# Altium PCB ESP32_Dongle.PcbDoc
Units mil, origin at the board's own origin, x right, y up, seen from the top; angles counter-clockwise.
Board outline 825 x 1415 mil, 2 copper layers (Top Layer, Bottom Layer); 56 components, 30 nets, 182 pads, 76 vias.
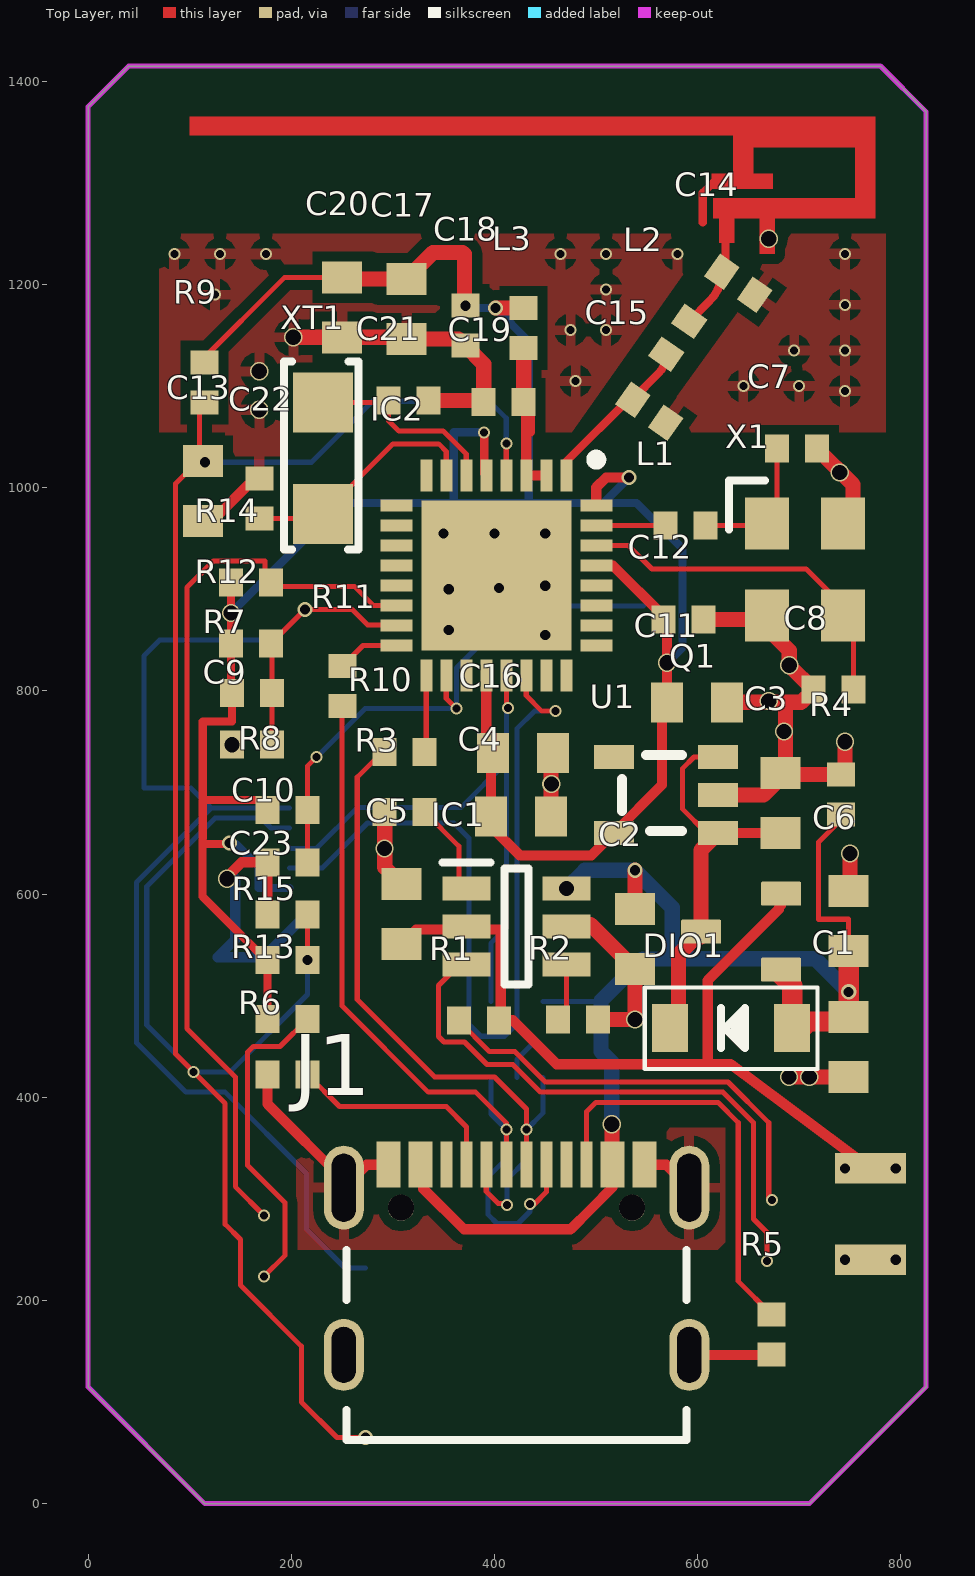
[diagram p0: Top Layer view]
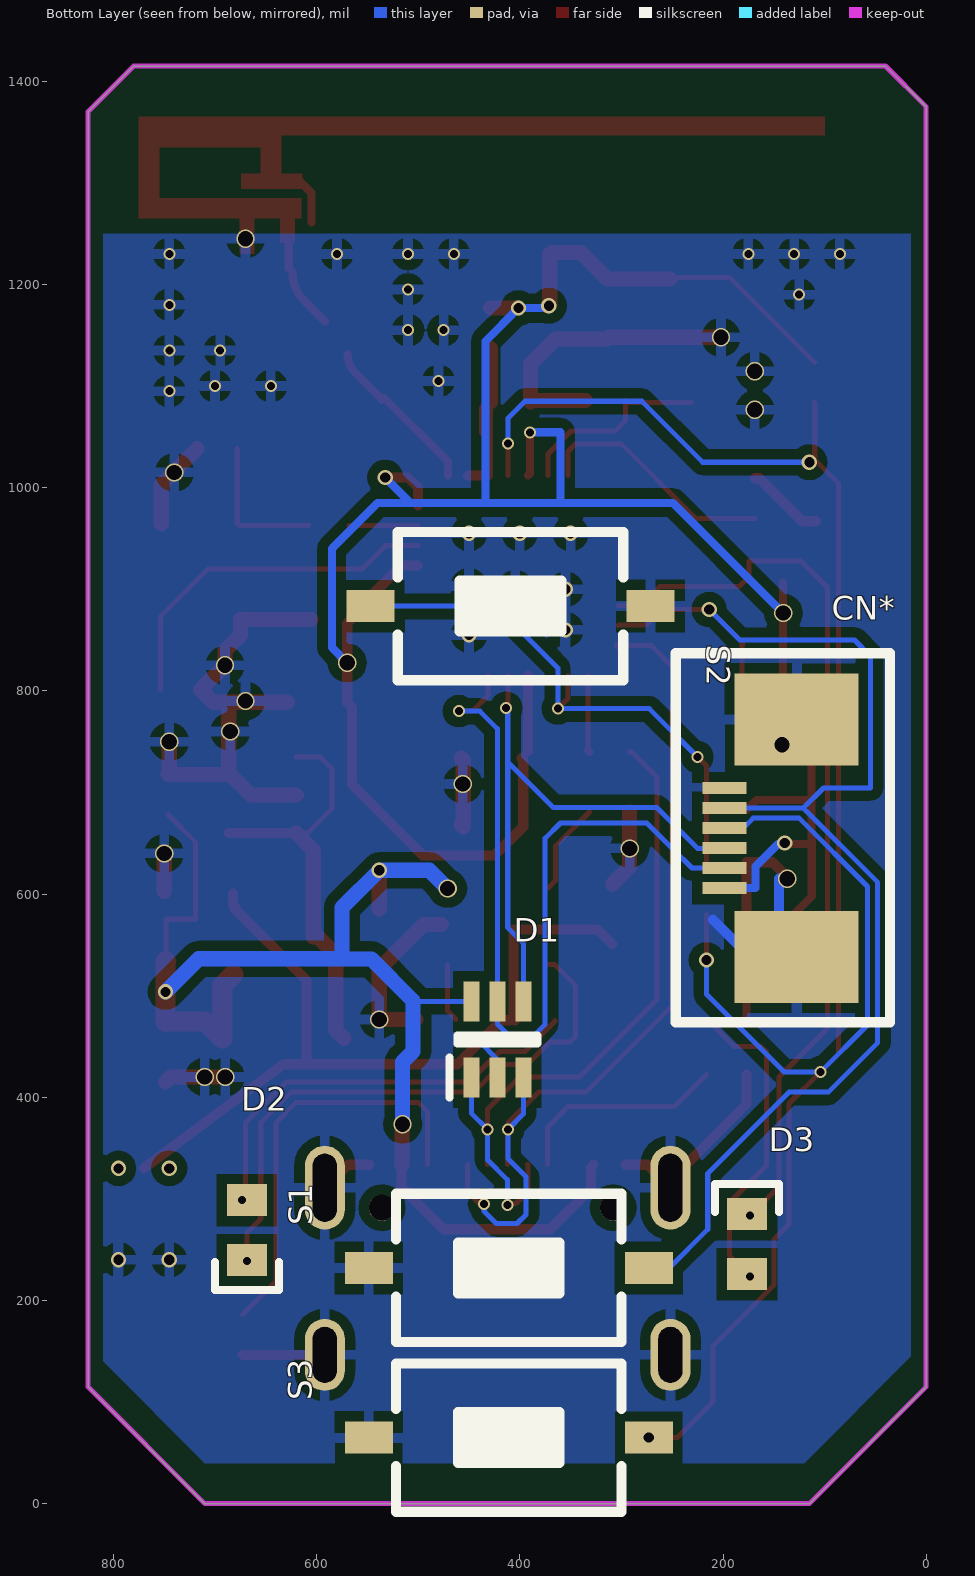
[diagram p1: Bottom Layer view, seen from below]
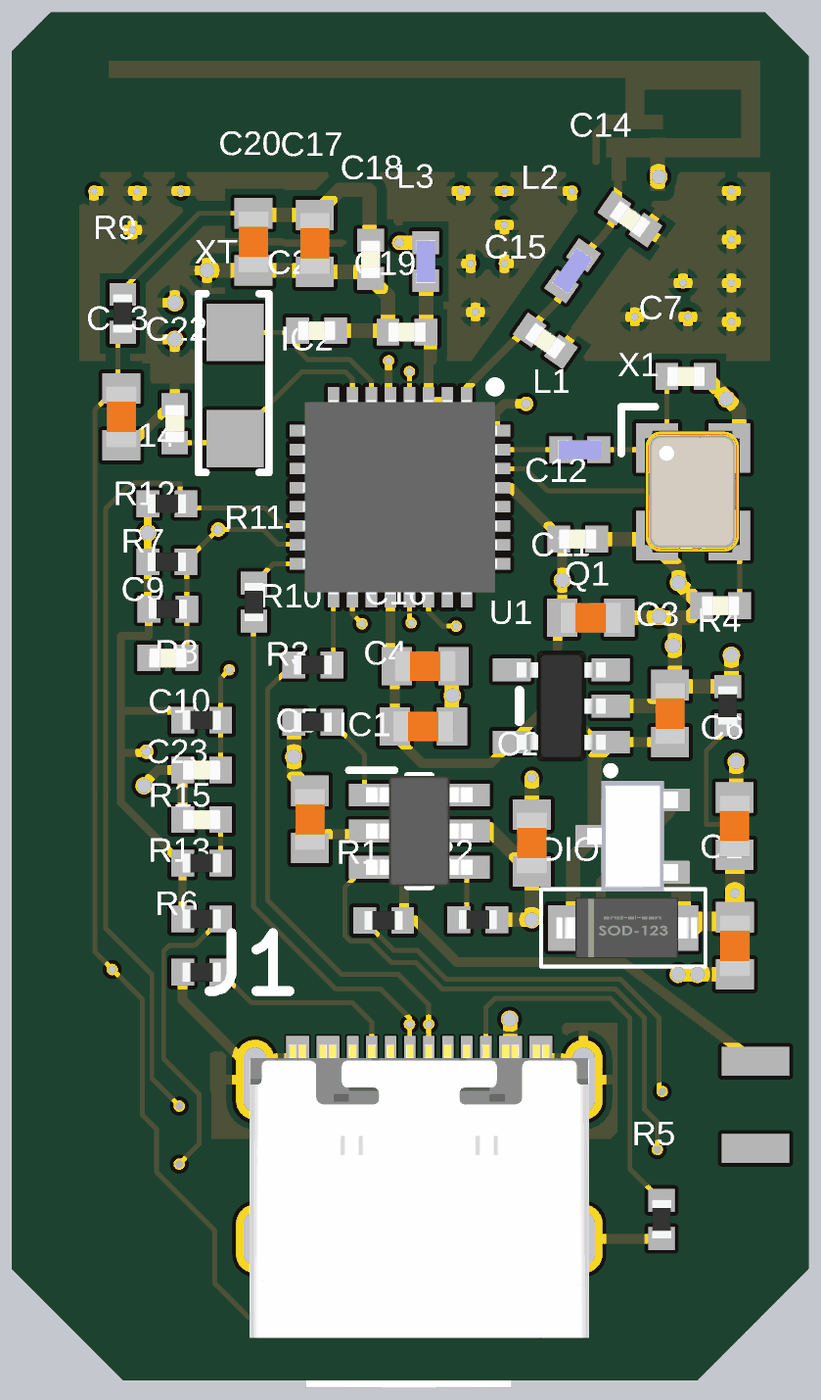
[diagram p2: 3D render of the assembled board from above, using the file's embedded part models]
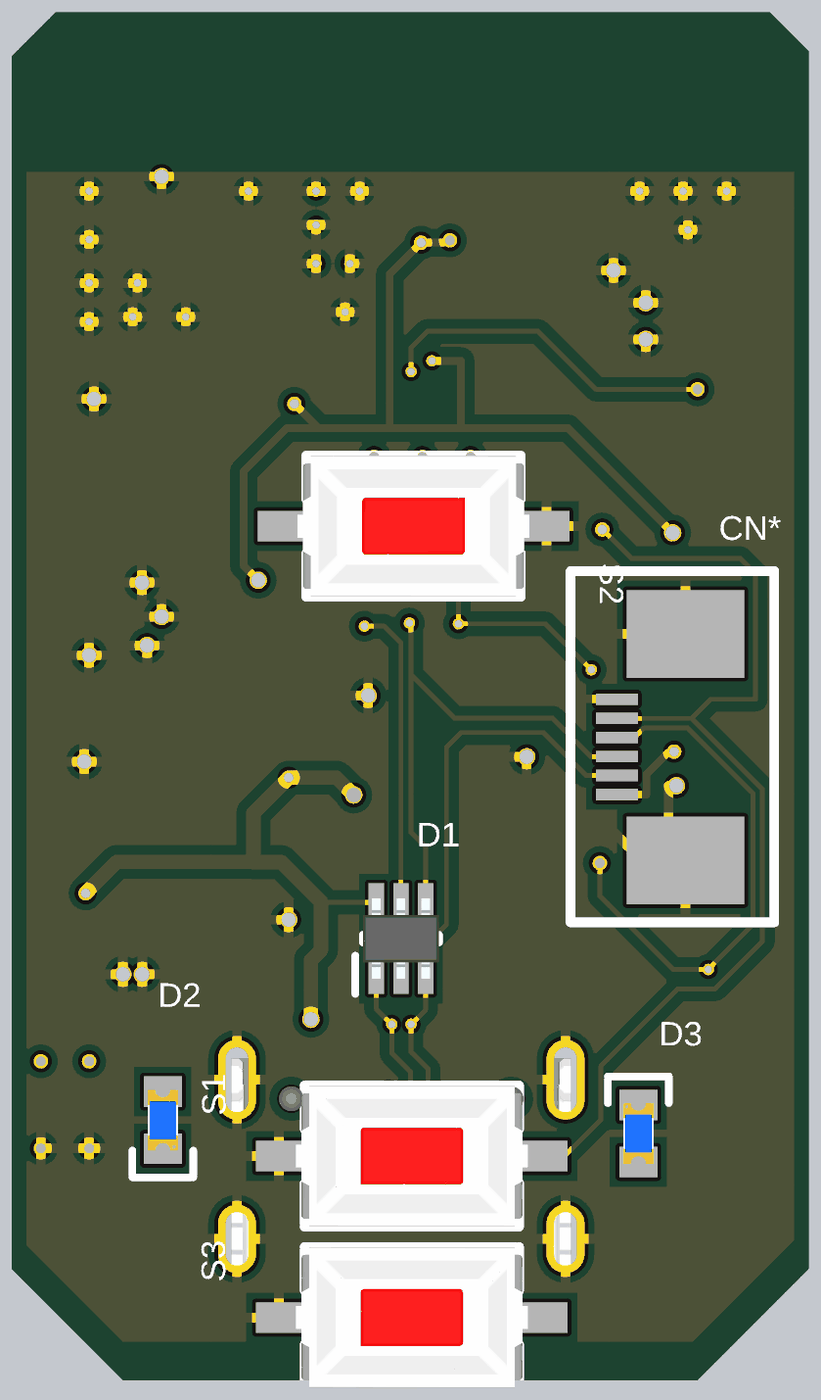
[diagram p3: 3D render of the assembled board from below, using the file's embedded part models]

## Layer stack, top to bottom
Top Solder: solder mask 0.4, Solder Resist, Dk 3.5
Top Layer: signal copper 1.4
Dielectric 1: dielectric 12.6, FR-4, Dk 4.8
Bottom Layer: signal copper 1.4
Bottom Solder: solder mask 0.4, Solder Resist, Dk 3.5

## Board outline
0,115 0,1375 40,1415 780,1415 825,1370 825,115 710,0 115,0

## Design rules (kind name [scope] priority, off if disabled: settings)
Clearance [All] p1: gap=10 ignorepadtopadclearanceinfootprint=FALSE except(0: Arc-Hole Track-Hole SMDPad-Hole THPad-Hole Via-Hole Fill-Hole Poly-Hole Region-Hole Text-Hole; 5: Arc-Arc Arc-Track Arc-SMDPad Track-Track Track-SMDPad SMDPad-SMDPad)
DiffPairsRouting [All] p1: maxlimit=10 minlimit=10 mostfreqgap=10 toplayer_minwidth=5 toplayer_maxwidth=15 toplayer_prefwidth=15 bottomlayer_minwidth=5 bottomlayer_maxwidth=15 bottomlayer_prefwidth=15 maxuncoupledlength=500
PolygonConnect [All] p1: connectstyle=Relief reliefconductorwidth=10 reliefentries=4 polygonreliefangle="90 Angle" airgapwidth=10
RoutingVias [All] p1: holewidth=28 width=50 viastyle="Through Hole" minholewidth=28 minwidth=50 maxholewidth=28 maxwidth=50
SolderMaskExpansion [All] p1: expansion=4 istentingtop=FALSE
Width [All] p1: maxlimit=100 minlimit=5 preferedwidth=10
29 further rules are at their usual default settings.

## Classes and differential pairs
differential pair class P: USB
differential pair class N: USB
differential pair USB: +USB_P -USB_N

## Components (designator, comment, footprint, x,y, rotation, side; value= is the part's Value field where it differs from the comment)
C1 "1uF" CAP_0603 748.66,449.49 r270 top
C2 "1uF" CAP_0603 538.36,555.72 r270 top
C3 "1uF" CAP_0603 681.51,689.67 r90 top
C4 "1uF" CAP_0603 426.12,676.32 r0 top
C5 "1uF" CAP_0603 308.68,580.21 r90 top
C6 "1uF" CAP_0603 748.36,573.32 r90 top
C7 "10pF" CAP_0402 697.99,1038.3 r0 top
C8 "10pF" CAP_0402 733.87,801.16 r180 top
C9 "100nF" CAP_0402 161.5,747.22 r0 top
C10 "100nF" CAP_0402 196.5,631.22 r0 top
C11 "10uF" CAP_0603 599.44,788.68 r180 top
C12 "100nF" CAP_0402 585.9,870.14 r180 top
C13 "1uF" CAP_0603 113.32,996.5 r90 top
C14 "3p3" CAP_0402 640.04,1201.07 r145 top
C15 "3.3pF" CAP_0402 552.38,1075.18 r145 top
C16 "100nF" CAP_0603 428,738.68 r180 top
C17 "10uF" CAP_0603 313.68,1175.95 r90 top
C18 "100nF" CAP_0402 371.42,1159.4 r90 top
C19 "100n" CAP_0402 409.14,1084.18 r0 top
C20 "100nF" CAP_0603 250.18,1177.51 r90 top
C21 "22pF" CAP_0402 315.55,1085.73 r0 top
C22 "22pF" CAP_0402 168.65,989.5 r90 top
C23 "100nF" CAP_0402 196.5,580 r0 top
CN* "FPC 6 PIN" "FPC 6 PIN" 198.5,655 r90 bottom
D1 "SMF05C.TCT" SM05F 422.12,456.92 r90 bottom
D2 "LED_C" LED_0603_BLUE 668.7,269.11 r90 bottom
D3 "BLUE" LED_0603_BLUE 176.3,255.39 r270 bottom
DIO1 "1N4007" DIO-SMD-123 633,468 r0 top value=1N5007
IC1 "BQ21040DBVR" BQ21040DBVR 421.83,568.07 r0 top
IC2 "ESP32-C6FH4" "esp32 c6FH4" 401.83,913.39 r270 top
J1 "USB4105-GF-A-060" USB4105-GF-A-060 421.83,240 r0 top locked
L1 "10nH" IND_0402 587.99,962.56 r0 top
L2 "2n2" IND_0402 580.43,1147.58 r55 top
L3 "L0402" IND_0402 428.54,1157.02 r270 top
Q1 "SSM3J338R,LF" SSM3J338R,LF-SOT23-F 642.79,562.91 r90 top
R1 "4.7K" RES_0402 384.96,475.73 r180 top
R2 "10K" RES_0402 482.46,476.53 r0 top
R3 "10K" RES_0402 311.73,680.73 r180 top
R4 "10K" RES_0402 741.22,697.96 r270 top
R5 "4.7K" RES_0402 672.78,166.5 r90 top
R6 "4.7K" RES_0402 196.5,422.22 r0 top
R7 "10K" RES_0402 161.5,797.78 r180 top
R8 "10K" RES_0402 196.5,682.78 r180 top
R9 "10K" RES_0402 114.71,1103.47 r90 top
R10 "R0402" RES_0402 311.73,740.02 r180 top
R11 "R0402" RES_0402 250.65,804.87 r90 top
R12 "10K" RES_0402 160.5,846.56 r180 top
R13 "4.7K" RES_0402 196.5,477.22 r0 top
R14 "10K" RES_0402 160.5,906.66 r0 top
R15 "10K" RES_0402 196.5,535 r180 top
S1 "SW-SMD" SW-SMD 410.86,232 r0 bottom
S2 "SW-SMD" SW-SMD 409.14,883.45 r180 bottom
S3 "SW-SMD" SW-SMD 410.86,65 r0 bottom
U1 "RT9193-33" RT9193_33 572.8,697.52 r0 top
X1 "40MHz" XTAL_3225 705.52,919.19 r270 top value=24MHz
XT1 "32.768KHz" CRYSTAL_SMD_3.2X1.5 231.06,1028.94 r270 top

## Footprints (in the part's own frame and the unit in brackets; to place one, negate y for a bottom-side part, rotate by r counter-clockwise, add the part's x,y. Pads: shape width x height; smd on the part's side, far side on the other; paste and mask are expansions set on the pad)
BQ21040DBVR [mm] "SOT95P280X145-6N"
  rect 1.2x0.6 smd: 1(-1.25,0.95) 2(-1.25,0) 3(-1.25,-0.95) 4(1.25,-0.95) 5(1.25,0) 6(1.25,0.95)
  silkscreen extent -1.85,-1.45 0.3,1.6, body extent -1.4,-1.45 1.4,1.45, height 1.2
CAP_0402 [mm]
  rect 0.6x0.7 smd: 1(-0.5,0) 2(0.5,0)
  body extent -0.5,-0.26 0.5,0.26, height 0.37
CAP_0603 [mm]
  rect 0.8x1 smd: 1(-0.75,0) 2(0.75,0)
  body extent -0.8,-0.4 0.8,0.4, height 0.51
CRYSTAL_SMD_3.2X1.5 [mm] "NDK NX3215SA 8.0*4.5 mm"
  rect 1.5x1.5 smd: 1(-1.397,0) 2(1.397,0)
  silkscreen extent -2.41,-0.96 2.29,0.89, body extent -1.6,-0.75 1.6,0.75, height 0.81
DIO-SMD-123 [mm]
  rect 0.9x1.2 smd: 1(1.524,0) 2(-1.524,0)
  silkscreen extent -2.16,-1.02 2.16,1.02, body extent -1.76,-0.8 1.94,0.8, height 1.25
"esp32 c6FH4" [mm] "QFN50P500X500X90-33N"
  rect 0.8x0.3 smd: 1(-2.5,1.75) 2(-2.5,1.25) 3(-2.5,0.75) 4(-2.5,0.25) 5(-2.5,-0.25) 6(-2.5,-0.75) 7(-2.5,-1.25) 8(-2.5,-1.75) 17(2.5,-1.75) 18(2.5,-1.25) 19(2.5,-0.75) 20(2.5,-0.25) 21(2.5,0.25) 22(2.5,0.75) 23(2.5,1.25) 24(2.5,1.75)
  rect 0.3x0.8 smd: 9(-1.75,-2.5) 10(-1.25,-2.5) 11(-0.75,-2.5) 12(-0.25,-2.5) 13(0.25,-2.5) 14(0.75,-2.5) 15(1.25,-2.5) 16(1.75,-2.5) 25(1.75,2.5) 26(1.25,2.5) 27(0.75,2.5) 28(0.25,2.5) 29(-0.25,2.5) 30(-0.75,2.5) 31(-1.25,2.5) 32(-1.75,2.5)
  rect 3.75x3.75 smd: 33(0,0)
  silkscreen extent -3.02,2.38 -2.78,2.63, body extent -2.55,-2.55 2.55,2.55, height 0.9
"FPC 6 PIN" [mm] "0.5mm Pitch"
  rect 0.3x1.1 smd: 1(-1.246,0) 2(-0.746,0) 3(-0.246,0) 4(0.254,0) 5(0.754,0) 6(1.254,0)
  rect 2.3x3.1 smd: ""(-2.977,-1.803) ""(2.972,-1.803)
  silkscreen extent -4.6,-4.14 4.62,1.22
IND_0402 [mm]
  rect 0.6x0.7 smd: 1(-0.5,0) 2(0.5,0)
  body extent -0.56,-0.26 0.56,0.26, height 0.67
LED_0603_BLUE [mm]
  rect 0.8x1 smd: A(0.75,0) K(-0.75,0)
  silkscreen extent -1.5,-0.8 -0.8,0.8, body extent -0.8,-0.4 0.8,0.4, height 0.6
RES_0402 [mm]
  rect 0.6x0.7 smd: 1(-0.5,0) 2(0.5,0)
  body extent -0.5,-0.25 0.5,0.25, height 0.3
RT9193_33 [mm]
  round 0.4 on Top Overlay: 1(1.2,-1.7)
  rect 1x0.6 smd: 1(1.2,-0.95) 2(1.2,0) 3(1.2,0.95) 4(-1.4,0.95) 5(-1.4,-0.95)
  silkscreen extent -1.2,-0.9 0.3,1, body extent -1.27,-1.46 1.07,1.46, height 1
SM05F [mm] "diod tvs"
  rect 1x0.4 smd: 1(-0.95,0.65) 2(-0.95,0) 3(-0.95,-0.65) 4(0.95,-0.65) 5(0.95,0) 6(0.95,0.65)
  silkscreen extent -1.45,-1 0.1,1.2, body extent -1.05,-1 1.05,1, height 1.1
SSM3J338R,LF-SOT23-F [mm]
  rrect10% 0.6x1 smd mask+0: D(0,1) G(-0.95,-1) S(0.95,-1)
  body extent -1.45,-1.2 1.45,1.2, height 0.91
SW-SMD [mm] "Switch SMD type"
  rect 1.2x0.8 smd: 1(-3.5,0) 2(3.5,0)
  silkscreen extent -2.82,-1.85 2.82,1.85, body extent -3.05,-1.85 3.05,1.85, height 2.5
USB4105-GF-A-060 [mm]
  rect 0.6x1.15 smd mask+0.05: A1B12(-3.2,2.378) A4B9(-2.4,2.378) B1A12(3.2,2.378) B4A9(2.4,2.378)
  rect 0.3x1.15 smd mask+0.05: A5(-1.25,2.378) A6(-0.25,2.378) A7(0.25,2.378) A8(1.25,2.378) B5(1.75,2.378) B6(0.75,2.378) B7(-0.75,2.378) B8(-1.75,2.378)
  round 0.65 hole 0.65 unplated mask+0.05: MH(-2.89,1.303) MH(2.89,1.303)
  oval 1x1.8 hole 0.6 slot 1.4 at 90 deg: SH(-4.32,-2.377) SH(4.32,-2.377)
  oval 1x2.1 hole 0.6 slot 1.7 at 90 deg: SH(-4.32,1.803) SH(4.32,1.803)
  silkscreen extent -4.25,-4.5 4.25,0.25, body extent -4.47,-4.97 4.47,2.73, height 3.27
XTAL_3225 [mm]
  rect 1.3x1.1 smd: 1(-1.15,-0.95) 2(1.15,-0.95) 3(1.15,0.95) 4(-1.15,0.95)
  silkscreen extent -2.23,-1.89 -1,-1, body extent -1.6,-1.28 1.6,1.22, height 0.61

## Part data
C1 C2 C3 C4 C5 C6 C11 C13 C16 C17 C20: library part CAP_0603_10V, "Capacitor SMD 0603 10V", LCSC=C19702, Manufacturer=Samsung, Manufacturer Part Number=CL10A106KP8NNNC
C7 C8 C21 C22: library part CAP_0402_50V, "Capacitor SMD 0402 50V", LCSC=C32949, Manufacturer=Samsung, Manufacturer Part Number=CL05C100JB5NNNC
C9 C10 C12 C18 C19 C23: library part CAP_0402_50V, "Capacitor SMD 0402 50V", LCSC=C1525, Manufacturer=Samsung, Manufacturer Part Number=CL05B104KO5NNNC
C14 C15: library part CAP_0402_50V, "Capacitor SMD 0402 50V", LCSC=C1565, Manufacturer=FH, Manufacturer Part Number=0402CG3R3C500NT
CN*: "FPC 6 Pin 0.5mm"
D1: "TVS Diode (Uni-directional)", Manufacturer_Name=SEMTECH, Mouser Part Number=947-SMF05C.TCT, Arrow Part Number=SMF05C.TCT, Arrow Price/Stock=https://www.arrow.com/en/products/smf05c.tct/semtech?region=nac, Datasheet Link=https://www.mouser.co.uk/datasheet/2/761/smf05c-1278099.pdf, Height=1.1mm, Manufacturer_Part_Number=SMF05C.TCT, Mouser Price/Stock=https://www.mouser.co.uk/ProductDetail/Semtech/SMF05C.TCT?qs=rBWM4%252BvDhIcdGOAFdL4XAA%3D%3D
D2 D3: library part LED_0603_BLUE, "LED 0603 BLUE SMD"
DIO1: library part "Diode SMD", "Default Diode", Code - JEDEC=DO-214-AB, Published=8-Jun-2000, Publisher="Altium Limited", Revision="July-2002: Re-released for DXP Platform."
IC1: "Pin Charger IC", Manufacturer_Name="Texas Instruments", Mouser Part Number=595-BQ21040DBVR, Arrow Part Number=BQ21040DBVR, Arrow Price/Stock=https://www.arrow.com/en/products/bq21040dbvr/texas-instruments?region=nac, Datasheet Link=http://www.ti.com/lit/gpn/bq21040, Height=1.45mm, Manufacturer_Part_Number=BQ21040DBVR, Mouser Price/Stock=https://www.mouser.co.uk/ProductDetail/Texas-Instruments/BQ21040DBVR?qs=cttFivMKqWyovUuY6Xwwcw%3D%3D
IC2: "Integrated Circuit", Manufacturer_Name="Espressif Systems", Mouser Part Number=356-ESP32-C6FH4, Datasheet Link=https://www.mouser.ch/ProductDetail/Espressif-Systems/ESP32-C6FH4?qs=sGAEpiMZZMu3sxpa5v1qriveB5Rxa06Y9iJOmwW58jU%3D, Height=0.9mm, Manufacturer_Part_Number=ESP32-C6FH4, Mouser Price/Stock=https://www.mouser.co.uk/ProductDetail/Espressif-Systems/ESP32-C6FH4?qs=Imq1NPwxi77uZvg%252BuAIiXA%3D%3D
J1: "USB Connector Type C SMT 12 Pin", Manufacturer=GCT, Manufacturer Part Number=USB4105-GF-A-060
L1 L3: library part IND_0402, "Inductor SMD 0402"
L2: library part IND_0402, "Inductor SMD 0402", LCSC=C412264, Manufacturer=Murata, Manufacturer Part Number=LQW15AN2N2G80D
Q1: "MOSFET P-Channel Vds=12V Id=6A", Manufacturer Part Number=Toshiba, Manufacturer=SSM3J338R,LF
R1 R2 R3 R4 R5 R6 R7 R8 R9 R10 R11 R12 R13 R14 R15: library part RES_0402, "Resistor SMD 0402"
S1 S2 S3: "Switch", LatestRevisionDate=17-Jul-2002, LatestRevisionNote="Re-released for DXP Platform.", PackageReference=SPST-2, Published=24-Mar-1999, Publisher="Altium Limited"
X1: library part TSX-3225_24.0000MF15X-AC, "Crystal SMD 24MHz 10PPM 7pF 3225", Load Capacitance=7pF, Manufacturer=Epson, Manufacturer Number="TSX-3225 24.0000MF15X-AC", ESR=40R, Type=XTAL
XT1: library part XTAL_Crystal, URL=http://thegioiic.com/products/32-768khz-crystal-c3215

## Free pads (board coordinates)
  rect 70x30 smd: 2(770,240) 2(770,330)

## Via types
v1: diameter 11.81, hole 7.87, Top Layer to Bottom Layer, 33 vias
v2: diameter 15, hole 10, Top Layer to Bottom Layer, 22 vias
v3: diameter 18, hole 15, Top Layer to Bottom Layer, 21 vias

## Nets (pads, with @x,y where several pads share a name; then routed paths per layer and width w, separated by ;. In a path a pad name is that pad's centre, name@x,y a point inside that pad or via, vN(x,y) a via of type N, cw(c..) or ccw(c..) an arc to the next point about the centre after c; other vN are vias at no path point)
5V_IN: C1.1 C2.1 C6.1 D1.6 DIO1.1 IC1.6 J1.A4B9 J1.B4A9 Q1.G R4.2 | length 1354.9
  Top Layer w5: R4.2@746.22,678.27 719.01,651.06 719.01,575.16 748.36,575.16 C6.1 C6.1@748.36,533.8
  Top Layer w10: J1.A4B9 330,330.94 330,310 370,270 475,270 495,290 516.32,311.3 J1.B4A9
  Top Layer w15: v3(515.38,373.5) 515.85,373.03 515.85,334.07 J1.B4A9 ; C2.1 v2(538.36,623.36)
  Top Layer w20: Q1.G@682.16,520.51 693,509.67 DIO1.1 693,458 709.6,474.6 748.08,474.6 748.66,474.02 C1.1 v2(748.66,503.76) 748.66,533.5 C6.1@748.36,533.8
  Bottom Layer w5: D1.6 504.33,494.33 505,495
  Bottom Layer w15: v3(471.05,605.47) 488.94,623.36 v2(538.36,623.36) 575,586.72 575,535.99 545.99,535.99 505,495 505,445 515.38,434.62 v3(515.38,373.5) ; 575,536.22 716.19,536.22 v2(748.66,503.76)
+3V3: C4.1 C11.2 C12.2 C16.2 C17.2 C18.2 C20.2 CN*.1 IC2.5 IC2.20 IC2.29 IC2.32 L3.1 R7.2 R8.2 R9.2 R12.2 R13.1 R14.1 R15.2 U1.5 | length 2769
  Top Layer w5: R9.2@109.71,1123.16 193.59,1207.04 C20.2
  Top Layer w8: 112.67,649.16 139.26,649.16 v2(139.26,650.28) ; 112.67,655 112.67,597.64 R15.2@175.31,535 ; 112.94,655 112.94,692.56 ; R14.1 v3(140.81,876.61) R12.2 140.81,798.78 R7.2 141.81,770 112.94,770 112.94,692.56 ; R13.1 R15.2 ; R8.2 167.03,692.56 112.94,692.56 ; v1(390,1054.49) 390,1013.8 IC2.5 ; C16.2@391.98,740.17 C16.2@398.47,733.68
  Top Layer w10: C20.2 C20.2@251.74,1205.48 ; C16.2@391.98,740.17 IC2.20 ; C16.2@398.47,733.68 396.59,731.81 C4.1 396.59,666.32 424.84,638.07 495.64,638.07 U1.5 565,707.43 565,783.77 C11.2 v3(569.92,827.57) 569.92,866.45 C12.2 566.22,873.78 516.77,923.23 IC2.29 ; IC2.32 500.25,1000.25 510,1010 v2(532.5,1010)
  Top Layer w15: C20.2@251.74,1205.48 C17.2 339.62,1231.42 368.58,1231.42 370,1230 370.47,1230 370.47,1180.03 v2(371.42,1179.08) ; v2(401.17,1176.7) L3.1
  Bottom Layer w8: v2(139.26,650.28) 139.26,649.86 139.96,649.16 145.84,649.16 167.85,627.15 167.85,605.94 CN*.1 ; v3(140.81,876.61) 249.2,985 360,985 ; v2(371.42,1179.08) 373.8,1176.7 v2(401.17,1176.7) 433.75,1144.12 433.75,985 ; v1(390,1054.49) 360,1054.49 360,985 ; v2(532.5,1010) 507.5,985 ; v3(569.92,827.57) 585,842.65 585,940 540,985 507.5,985 ; 360,985 433.75,985 ; 433.75,985 507.5,985
ANT: C14.2 L2.2 | length 142.2
  Top Layer w8: L2.2 612.27,1184.25 ccw(c584.16,1212.36) C14.2 627.4,1215.86 627.4,1247.4 630,1250 ; 605,1260.91 605,1290 ; 607.5,1292.5 616.45,1301.45
CHIP_EN: C13.2 C23.2 CN*.4 IC2.4 R9.1 R15.1 S3.1 | length 2104.1
  Top Layer w5: R9.1@109.71,1083.79 109.71,1027.41 86.14,1003.84 86.14,938.86 86.14,442.7 v1(103.84,425) 135,393.84 135,275 150,260 150,215 210,155 210,100 245,65 v2(273.06,65) ; v2(216.18,535) C23.2 ; IC2.4 v1(411.67,1043.33)
  Bottom Layer w5: v2(115,1025) 220,1025 280,1085 395,1085 411.67,1068.33 v1(411.67,1043.33) ; CN*.4 180.02,665 170.33,674.69 125.09,674.69 57.78,607.38 57.78,471.05 v1(103.84,425) 140,425 216.09,501.09 v2@216.09,535
GND: C1.2 C2.2 C3.2 C4.2 C5.2 C6.2 C7.2 C8.2 C9.1 C10.1 C11.1 C12.1 C13.1 C14.1 C15.1 C16.1 C17.1 C18.1 C19.1 C20.1 C21.2 C22.2 C23.1 CN*. CN*.6 D1.2 IC1.5 IC2.33 J1.A1B12 J1.B1A12 J1.SH pad.2@770,240 R2.2 R3.2 R4.1 R5.1 R6.1 S1.2 S2.2 S3.2 U1.2 X1.2 X1.4 | length 1998.4
  Top Layer w10: C13.1@108.32,966.97 C13.1 121.97,966.97 164.19,1009.19 C22.2 ; v3(136.84,615) 135.94,615 135.47,615.47 151.22,631.22 C10.1 C23.1@176.81,581.5 ; R6.1 176.81,393.19 J1.SH@252.89,317.11 ; J1.SH@251.75,310.96 274.39,333.6 J1.A1B12 ; C17.1@312.13,1147.98 C17.1 ; J1.B1A12 569.27,333.6 J1.SH@591.91,310.96 ; J1.SH@591.91,146.4 672.37,146.4 R5.1
  Top Layer w15: v3(202.02,1147.98) C20.1 C17.1@312.13,1147.98 ; R3.2 292.05,626.38 C5.2 ; C17.1 364.71,1146.43 C18.1 389.46,1121.67 C19.1 387.9,1085.73 C21.2 ; C4.2@455.65,666.32 C4.2@457.52,668.19 ; C4.2@455.65,671.32 C4.2 455.65,731.81 C16.1@457.52,733.68 ; IC1.5@477.03,570 494.56,570 C2.2 v3(538.36,476.53) R2.2 ; C12.1 674.34,870.14 675,870.8 675,855 690.22,839.78 v3(690.22,825.12) C8.2 701.71,788.68 690,788.68 ; U1.2 664.83,697.52 C3.2@686.51,719.2 ; C11.1 690,788.68 ; v3(690,420) v3(710,420) 743.62,420 C1.2@748.66,414.96 ; C7.2 752.92,1003.06 X1.4@752.92,964.47 ; v3(745,750) 745,718.86 746.22,717.64 R4.1 688.07,717.64 C3.2@686.51,719.2 ; C6.2@750,602.85 v3(750,640) ; C3.2@686.51,719.2 686.51,785.2 690,788.68
  Bottom Layer w5: D1.2 422.12,437.12 440,455
  Bottom Layer w10: v3@145,615 145,555.28 127.52,537.8 172.8,537.8 210,575
  other v1: 745,1095 645,1100 700,1100 480,1105 695,1135 745,1135 475,1155 510,1155 745,1180 125,1190 510,1195 85,1230 130,1230 175,1230 465,1230 510,1230 580,1230 745,1230
  other v2: 745,240 795,240 450,855 355,860 355,900 404.36,901.26 450,903.45 350,955 400,955 450,955
  other v3: 291.9,644.93 456.08,708.29 141.81,747 685,760 670,790 740,1015 168.65,1076.63 168.65,1114.61 670,1245
GPIO_8: D3.K IC2.14 R14.2 | length 893.7
  Top Layer w5: v1(173.33,283.69) 145,312.02 145,420 97.26,467.74 97.26,901.63 123.46,927.84 125.79,927.84 125.89,927.94 155.73,927.94 155.83,927.84 174.34,927.84 174.34,912.5 R14.2 184.34,902.5 262.5,902.5 281.14,883.86 IC2.14
GPIO_9: C9.2 CN*.5 IC2.15 R7.1 R12.1 S1.1 | length 1313.2
  Top Layer w5: C9.2 R7.1 181.18,845.56 R12.1 v2(213.62,880) 260,880 275,865 302.57,865 IC2.15
  Bottom Layer w5: CN*.5 120.94,684.69 ; v2(213.62,880) 183.62,850 70.57,850 55,834.43 55,750.63 55,704.47 101.16,704.47 120.94,684.69 ; S1.1 253,232 215,270 215,325 135,405 96.44,405 47.78,453.66 47.78,611.53 120.94,684.69
GPIO_14_F1: C10.2 IC2.18 R8.1 S2.1 | length 550.9
  Top Layer w5: C10.2 R8.1 216.18,726.18 v1(225.05,735) ; IC2.18 352.61,792.48 v1(362.59,782.5)
  Bottom Layer w5: v1(225.05,735) 272.55,782.5 v1(362.59,782.5) 362.59,822.59 423.45,883.45 S2.1
LNA_IN: C15.2 IC2.1 L2.1 | length 164
  Top Layer w8: IC2.1 470.72,1025.72 533.86,1088.86 C15.2 536.26,1087.31 561.8,1112.85 ccw(c543.38,1131.26) L2.1@569.42,1131.26
NetC3_1: C3.1 DIO1.2 Q1.D U1.1@620.05,660.12 U1.3 | length 417.3
  Top Layer w5: U1.1@620.05,660.12 608.82,660.12 585,683.93 585,723.41 596.51,734.92 U1.3
  Top Layer w10: U1.1@620.05,660.12 C3.1@686.49,660.12
  Top Layer w15: DIO1.2@573,458 581.23,466.23 581.23,540.42 603.42,562.6 Q1.D ; Q1.D@603.42,557.91 603.42,643.17 605.92,645.67 605.92,645.99 U1.1@620.05,660.12
NetC7_1: C7.1 L1.2 X1.1 | length 145.1
  Top Layer w5: L1.2 676.2,962.56 678.11,964.47 678.11,1038.11 C7.1
NetC8_1: C8.1 IC2.30 X1.3 | length 354.3
  Top Layer w5: IC2.30 532.09,942.91 555,920 706.83,920 752.92,873.92 753.55,873.28 C8.1
NetC19_2: C19.2 IC2.2 IC2.3 L3.2 | length 174.5
  Top Layer w10: L3.2 L3.2@428.83,1137.04 ; C19.2 C19.2@431.35,1081.65 ; 435,1055 435,1078.01 C19.2@431.35,1081.65 ; IC2.2 IC2.3 C19.2@431.35,1081.65
  Top Layer w15: C19.2 L3.2@428.83,1137.04
NetC21_1: C21.1 IC2.6 XT1.1 | length 196.7
  Top Layer w5: XT1.1 294.07,1083.94 C21.1 295.87,1065.86 305.96,1055.77 349.54,1055.77 372.3,1033.01 IC2.6
NetC22_1: C22.1 IC2.7 XT1.2 | length 241.2
  Top Layer w5: C22.1 226.94,969.82 XT1.2 300.2,1043.08 345.15,1043.08 352.61,1035.61 IC2.7
NetD2_A: D2.A R1.2 | length 425.8
  Top Layer w5: R1.2 365.28,474.72 395,445 420,445 450,415 630,415 670,375 670,300.36 671.74,300.36 v1(673.41,298.69)
NetD2_K: D2.K IC1.3 | length 573.3
  Top Layer w5: IC1.3 365.67,530.67 345,510 345,459.81 350.36,454.45 370.55,454.45 392.68,432.32 418.12,432.32 445.44,405 625,405 655,375 655,280.28 668.33,266.94 v1(668.33,238.69)
NetD3_A: D3.A R13.2 | length 316.9
  Top Layer w5: v1(173.33,223.69) 193.71,244.07 193.71,296.29 157.18,332.82 157.18,444.45 162.73,450 188.96,450 R13.2
NetIC1_1: IC1.1 R3.1 | length 92.3
  Top Layer w5: R3.1 365,647.15 365,613.09 IC1.1
NetIC1_4: IC1.4 R2.1 | length 57.6
  Top Layer w5: R2.1 471.05,484.8 IC1.4
NetIC2_16: IC2.16 R11.2 | length 61.1
  Top Layer w5: R11.2 270.65,844.56 IC2.16@303.33,844.56
  Top Layer w7.87: IC2.16@303.33,844.56 IC2.16
NetIC2_17: IC2.17 R10.1 | length 75.6
  Top Layer w5: R10.1@332.93,741.53 IC2.17
  Top Layer w7.87: R10.1 R10.1@332.93,741.53
NetIC2_31: IC2.31 L1.1 | length 68.1
  Top Layer w5: IC2.31 L1.1 L1.1
NetJ1_A5: J1.A5 R6.2 | length 214.9
  Top Layer w5: R6.2 247.59,390.81 352.61,390.81 372.61,370.81 J1.A5
NetJ1_B5: J1.B5 R5.2 | length 415.9
  Top Layer w5: J1.B5 490.72,385.72 500,395 620,395 640,375 640,218.96 R5.2
UART0_RX: CN*.2 D1.5 IC2.22 | length 831.6
  Top Layer w5: IC2.22 431.35,795.37 446.72,780 v1(460,780)
  Bottom Layer w5: CN*.2 230.63,625.63 249.37,644.37 275,670 360,670 375,655 375,471.74 386.74,460 410,460 422.12,472.12 D1.5 422.12,762.68 439.44,780 v1(460,780)
UART0_TX: CN*.3 D1.4 IC2.21 | length 578.8
  Top Layer w5: IC2.21 411.78,814.85 411.78,783.44 411.89,783.33 v1(413.41,783.33)
  Bottom Layer w5: CN*.3 198.82,645 225,645 265,685 366.89,685 411.89,730 ; D1.4 396.53,551.53 411.89,566.89 411.89,730 ; v1(413.41,783.33) 411.89,783.33 411.89,730
USB_N: D1.1 J1.A7 J1.B7 R10.2 | length 714.7
  Top Layer w5: R10.2 290.02,740.02 265,715 265,496.21 341.21,420 400,420 431.67,388.33 v1(431.67,368.33) J1.A7 ; J1.B7 392.01,333.31 392.01,307.16 403.73,295.44 410.85,295.44 v1(412.24,294.04)
  Bottom Layer w5: v1(412.24,294.04) 412.24,318.9 431.67,338.33 v1(431.67,368.33) 447.71,384.37 D1.1
USB_P: D1.3 J1.A6 J1.B6 R11.1 | length 798.2
  Top Layer w5: R11.1@250,785.19 250,490 335,405 381.52,405 411.67,374.85 v1(411.67,368.33) ; J1.A6 v1@411.98,366.8 ; v1(435,295) 439.43,295 451.35,306.93 J1.B6
  Bottom Layer w5: D1.3 396.53,383.47 v1(411.67,368.33) 411.67,339.54 393.84,321.71 393.84,284.45 402.65,275.64 423.14,275.64 435,287.5 v1(435,295)
V_BAT: C5.1 IC1.2 pad.2@770,330 Q1.S R1.1 | length 803.1
  Top Layer w10: C5.1 323,565 372.62,565 406.24,565 406.24,477.33 R1.1 ; R1.1@410,475.73 418.07,475.73 461.33,432.48 610,432.48 ; Q1.S 682.16,588.74 680,586.58 680,585 610,515 610,432.48 ; pad.2@770,330 632.52,432.48 610,432.48
  other v2: 745,330 795,330
pads on no net: IC2.8 IC2.9 IC2.10 IC2.11 IC2.12 IC2.13 IC2.19 IC2.23 IC2.24 IC2.25 IC2.26 IC2.27 IC2.28 J1.A8 J1.B8 J1.MH U1.1@620.05,630.59 U1.4
copper on no net: | length 3.5
  Top Layer w8: 605,1290 607.5,1292.5

## Polygon pours and split planes (outlines as drawn)
GND on Top Layer "GND_L01_P002" (solid, remove dead copper, pour order 2): 70,1250 785,1250 785,1054.49 70,1054.49
GND on Top Layer "GND_L01_P003" (solid, pour order 3): 205,370 630,370 630,260 620,250 205,250
GND on Top Layer "GND_L01_P001" (solid, remove dead copper, pour order 1): 400,1070 395,1075 395,1150 385,1160 330,1160 330,1175 325,1180 195,1180 135,1120 135,995 190,995 190,1120 215,1120 230,1135 235,1130 310,1130 310,1110 320,1100 320,1070
GND on Bottom Layer "GND_L02_P004" (solid, pour order 4): 15,1250 15,145 120,40 710,40 810,140 810,1250

## Keep-outs
Keep-Out Layer:
  the board outline again, w5

## Other copper
Top Layer:
  rectangle net GND: 661.12,1230 676.12,1285.18
  rectangle net ANT: 621.12,1240.92 636.12,1285.18
  pour cut-out: 600.11,1229.72 475.76,1053.96 495,1035 540,1035 659.02,1199.8
  region net ANT: 614.02,1308.95 674.02,1308.95 674.02,1293.95 614.02,1293.95
  region net ANT: 635,1300 635,1350 655,1350 655,1300
  region net ANT: 775,1365 100,1365 100,1346.99 635,1346.99 635,1335 775,1335
  region net ANT: 775,1365 755,1365 755,1275 775,1275
  region net ANT: 615.26,1285 615.26,1265 775,1265 775,1285
Bottom Layer:
  pour cut-out: 75,1250.41 75,1380 785,1380 785,1250.41

## Text inside footprints (layer, text, board x,y; h text height)
D2: Mechanical 13 "+" at 692.65,320.95 h19.68 r270
D3: Mechanical 13 "+" at 152.34,203.55 h19.68 r90